# EAGLE board Main BoardV4 (EAGLE 9.1.3)
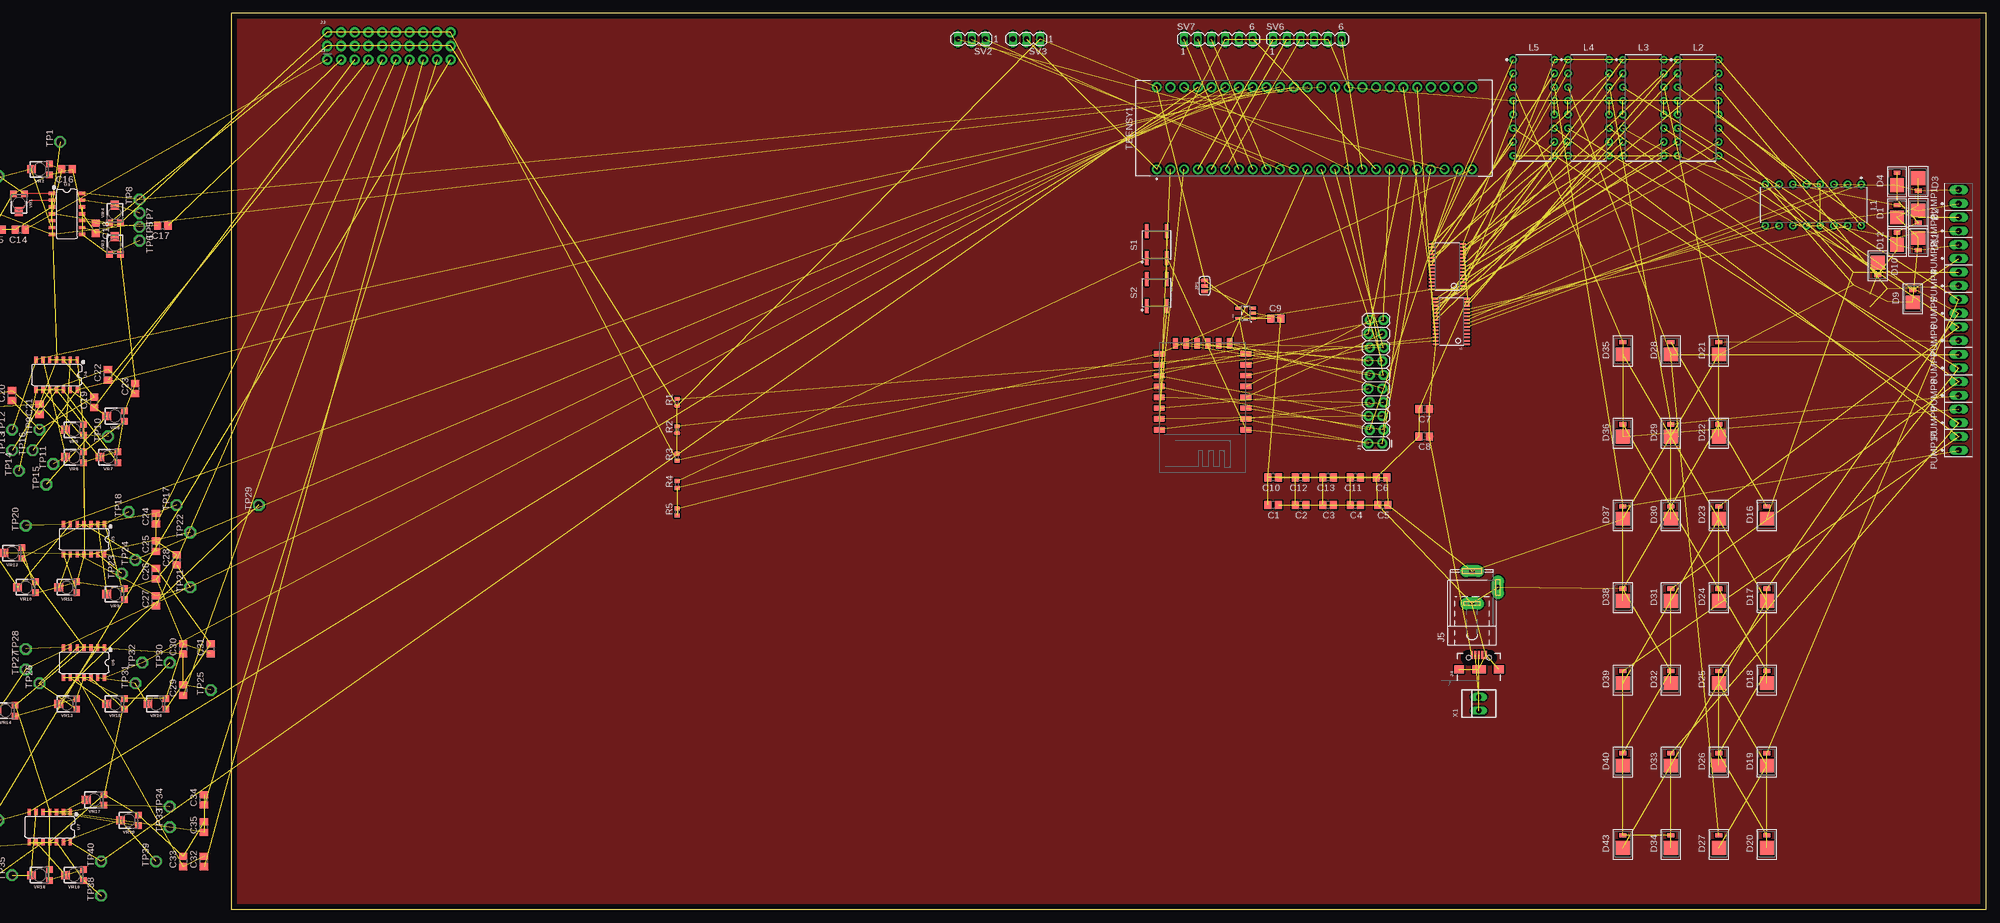
[diagram p0: board, top side]
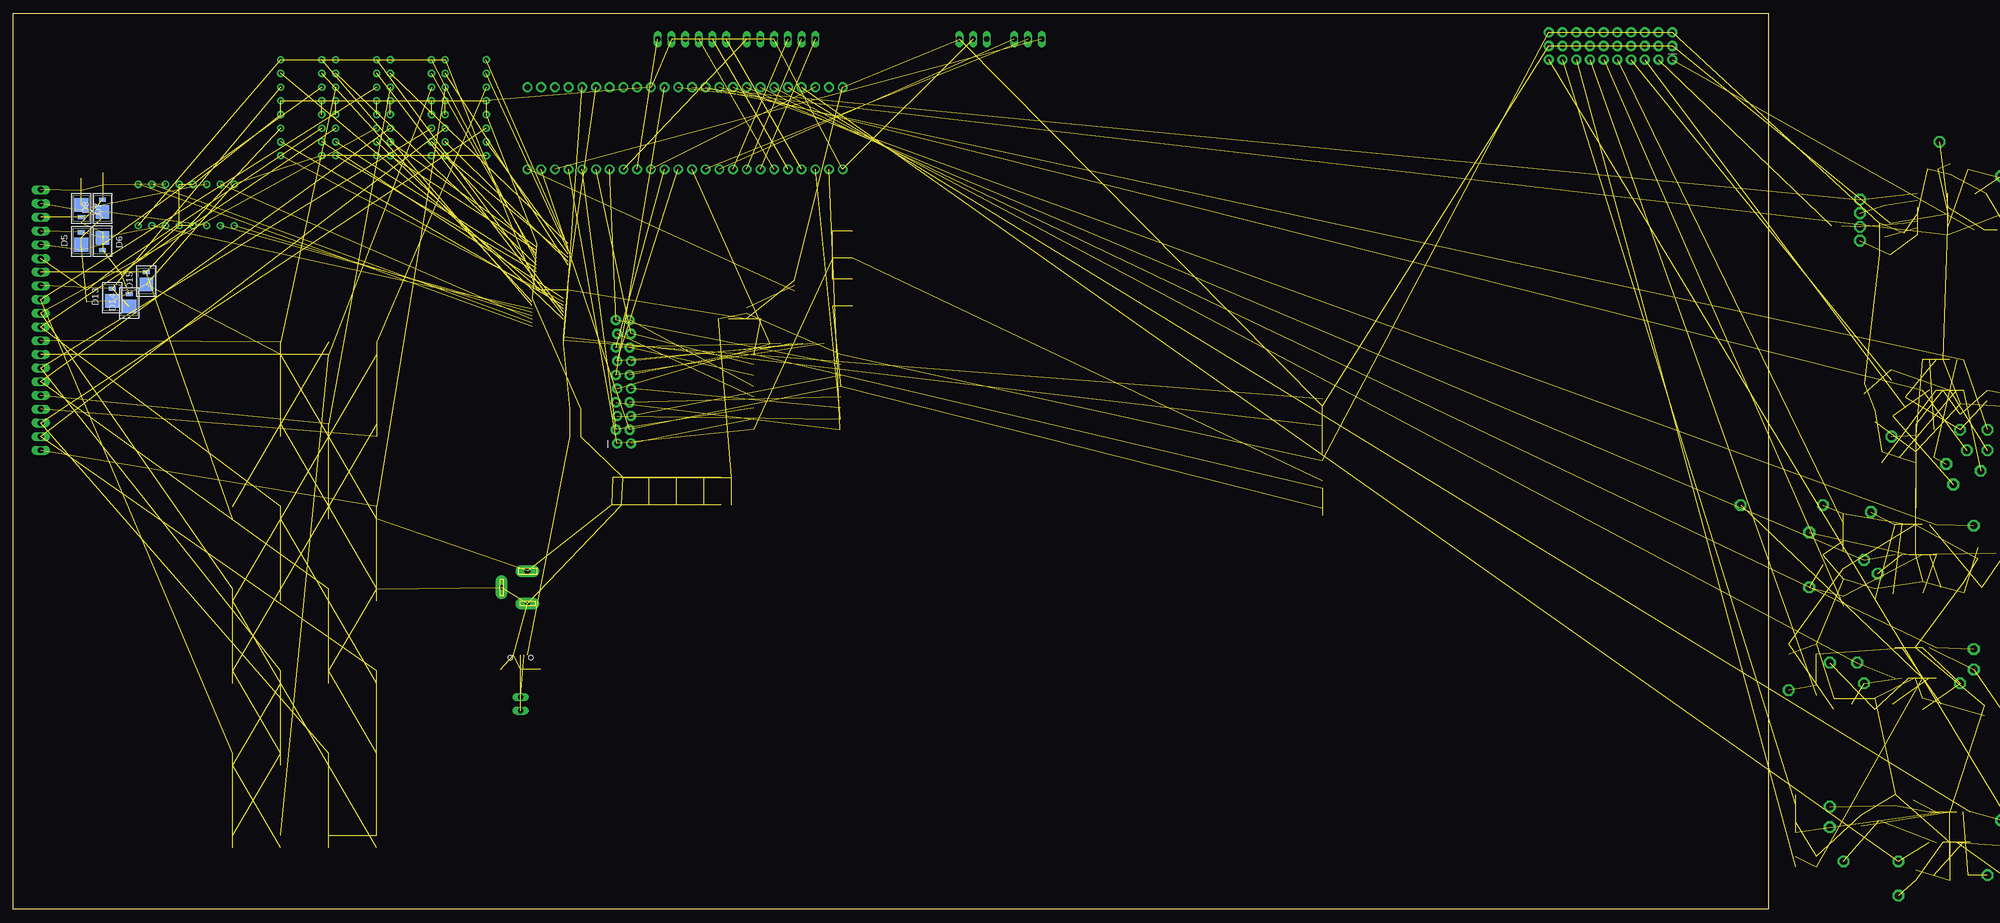
[diagram p1: board, bottom side, seen from below]

Size 325.1 x 166.04 mm. Coordinates in mm from the lower left corner, seen from the top.
Outline: 0,0 325.1,0 325.1,166.04 0,166.04 0,0
Copper layers (1*16): Top 0.035mm / dielectric 1.5mm / Bottom 0.035mm
Design rules "default": minimum track width 6mil, minimum drill 0.35mm, track to track 6mil, track to pad 6mil, pad to pad 6mil, via to via 6mil, smd to smd 6mil, copper to edge 40mil, drill to drill 6mil, minimum pad ring 10mil, minimum via ring 8mil, stop-mask expansion 4mil, vias tented up to drill 0mil, thermal gap 10mil
Net classes: 1 Motor: width 0.782 mm, drill 0.6 mm, clearance 0.152 mm

## Footprints (pad centres in the part's own frame; a part is rotated, then mirrored left to right if it is on the bottom)
C0805 = smd 1.3 x 1.5: 1 -0.95,0; 2 0.95,0
DIOC4519X114 = smd 2.54 x 2.54: 1 -1.27,0 | smd 0.762 x 1.27: 2 1.016,0
ESP8266MOD = smd 2.007 x 0.991: 1 0,0; 2 0,-2.007; 3 0,-4.013; 4 0,-6.02; 5 0,-8.026; 6 0,-10.033; 7 0,-12.04; 8 0,-14.046; 15 16.053,-14.046; 16 16.053,-12.04; 17 16.053,-10.033; 18 16.053,-8.026; 19 16.053,-6.02; 20 16.053,-4.013; 21 16.053,-2.007; 22 16.002,0 | smd 0.991 x 2.007: 9 2.997,-16.002; 10 5.004,-16.002; 11 7.01,-16.002; 12 9.017,-16.002; 13 11.024,-16.002; 14 13.03,-16.002
1X10_NO_SILK = drill 1.016 pad 1.88: 1 0,0; 2 2.54,0; 3 5.08,0; 4 7.62,0; 5 10.16,0; 6 12.7,0; 7 15.24,0; 8 17.78,0; 9 20.32,0; 10 22.86,0
2X10_NOSILK = drill 1.016 pad 1.88: 1 0,0; 2 0,2.54; 3 2.54,0; 4 2.54,2.54; 5 5.08,0; 6 5.08,2.54; 7 7.62,0; 8 7.62,2.54; 9 10.16,0; 10 10.16,2.54; 11 12.7,0; 12 12.7,2.54; 13 15.24,0; 14 15.24,2.54; 15 17.78,0; 16 17.78,2.54; 17 20.32,0; 18 20.32,2.54; 19 22.86,0; 20 22.86,2.54
2X10_LOCK = drill 1.016 pad 1.88: 1 0,0.127; 2 0,2.667; 3 2.54,-0.127; 4 2.54,2.413; 5 5.08,0.127; 6 5.08,2.667; 7 7.62,-0.127; 8 7.62,2.413; 9 10.16,0.127; 10 10.16,2.667; 11 12.7,-0.127; 12 12.7,2.413; 13 15.24,0.127; 14 15.24,2.667; 15 17.78,-0.127; 16 17.78,2.413; 17 20.32,0.127; 18 20.32,2.667; 19 22.86,-0.127; 20 22.86,2.413
USB-B-MICRO-SMD = smd 1.45 x 0.4: D+ 2.725,0; D- 2.725,0.65; GND 2.725,-1.3; ID 2.725,-0.65; VBUS 2.725,1.3 | smd 1.5 x 1.8: SHIELD1 0,3.685; SHIELD2 0,-3.685 | smd 1.5 x 2.5: SHIELD3 0,0 | hole 0.85: 2.2,1.9; 2.2,-1.9
SPC4077 = drill 0.8 pad 2.184 long: 1 -3,0; 2 0,-4.8 | drill 1 pad 2.184 long: 3 3,0
SMT-JUMPER_3_1-NC_TRACE_SILK = smd 0.635 x 1.27: 1 -1.016,0; 2 0,0; 3 1.016,0
DIP762W53P254L1969H508Q16B = drill 0.743 pad 1.343: 1 -3.81,8.89; 2 -3.81,6.35; 3 -3.81,3.81; 4 -3.81,1.27; 5 -3.81,-1.27; 6 -3.81,-3.81; 7 -3.81,-6.35; 8 -3.81,-8.89; 9 3.81,-8.89; 10 3.81,-6.35; 11 3.81,-3.81; 12 3.81,-1.27; 13 3.81,1.27; 14 3.81,3.81; 15 3.81,6.35; 16 3.81,8.89
1X2_HEADER = drill 1.105 pad 1.705 long: 1 0,0; 2 2.54,0
R0402 = smd 0.7 x 0.9: 1 -0.65,0; 2 0.65,0
SOT370P645X154-4 = smd 2.605 x 0.712: 1 -2.522,1.85; 2 -2.522,-1.85; 3 2.522,-1.85; 4 2.522,1.85
MA03-1 = drill 1.016 long: 1 -2.54,0; 2 0,0; 3 2.54,0
MA06-1 = drill 1.016 long: 1 -6.35,0; 2 -3.81,0; 3 -1.27,0; 4 1.27,0; 5 3.81,0; 6 6.35,0
DIP1524W60P254L6350H635Q48A = drill 1.112 pad 1.812: 1 -7.62,29.21; 2 -7.62,26.67; 3 -7.62,24.13; 4 -7.62,21.59; 5 -7.62,19.05; 6 -7.62,16.51; 7 -7.62,13.97; 8 -7.62,11.43; 9 -7.62,8.89; 10 -7.62,6.35; 11 -7.62,3.81; 12 -7.62,1.27; 13 -7.62,-1.27; 14 -7.62,-3.81; 15 -7.62,-6.35; 16 -7.62,-8.89; 17 -7.62,-11.43; 18 -7.62,-13.97; 19 -7.62,-16.51; 20 -7.62,-19.05; 21 -7.62,-21.59; 22 -7.62,-24.13; 23 -7.62,-26.67; 24 -7.62,-29.21; 25 7.62,-29.21; 26 7.62,-26.67; 27 7.62,-24.13; 28 7.62,-21.59; 29 7.62,-19.05; 30 7.62,-16.51; 31 7.62,-13.97; 32 7.62,-11.43; 33 7.62,-8.89; 34 7.62,-6.35; 35 7.62,-3.81; 36 7.62,-1.27; 37 7.62,1.27; 38 7.62,3.81; 39 7.62,6.35; 40 7.62,8.89; 41 7.62,11.43; 42 7.62,13.97; 43 7.62,16.51; 44 7.62,19.05; 45 7.62,21.59; 46 7.62,24.13; 47 7.62,26.67; 48 7.62,29.21
P1-13 = drill 1.321 pad 2.159 octagon: TP 0,0
TSSOP28 = smd 0.305 x 0.991: 1 -4.225,-2.918; 2 -3.575,-2.918; 3 -2.925,-2.918; 4 -2.275,-2.918; 5 -1.625,-2.918; 6 -0.975,-2.918; 7 -0.325,-2.918; 8 0.325,-2.918; 9 0.975,-2.918; 10 1.625,-2.918; 11 2.275,-2.918; 12 2.925,-2.918; 13 3.575,-2.918; 14 4.225,-2.918; 15 4.225,2.918; 16 3.575,2.918; 17 2.925,2.918; 18 2.275,2.918; 19 1.625,2.918; 20 0.975,2.918; 21 0.325,2.918; 22 -0.325,2.918; 23 -0.975,2.918; 24 -1.625,2.918; 25 -2.275,2.918; 26 -2.925,2.918; 27 -3.575,2.918; 28 -4.225,2.918
SO14 = smd 0.6 x 1.2: 1 -3.175,-2.8; 2 -1.905,-2.8; 3 -0.635,-2.8; 4 0.635,-2.8; 5 1.905,-2.8; 6 3.175,-2.8; 7 4.445,-2.8; 8 4.445,2.8; 9 3.175,2.8; 10 1.905,2.8; 11 0.635,2.8; 12 -0.635,2.8; 13 -1.905,2.8; 14 -3.175,2.8
SOT23-5 = smd 0.55 x 1.2: 1 -0.95,-1.3; 2 0,-1.3; 3 0.95,-1.3; 4 0.95,1.3; 5 -0.95,1.3
TRIMPOT-SMD-TC33X = smd 1.2 x 1.2: 1 -1,-1.825; 3 1,-1.825 | smd 1.5 x 1.6: 2 0,1.5
22-23-2021 = drill 1 long: 1 -1.27,0; 2 1.27,0

## Placement (x,y rotation side)
C1  [C0805]  193.04,74.93 180 top
C2  [C0805]  198.12,74.93 180 top
C3  [C0805]  203.2,74.93 180 top
C4  [C0805]  208.28,74.93 180 top
C5  [C0805]  213.36,74.93 180 top
C6  [C0805]  213.11,80.01 180 top
C7  [C0805]  220.98,92.71 180 top
C8  [C0805]  220.98,87.63 180 top
C9  [C0805]  193.55,109.47 0 top
C10  [C0805]  193.04,80.01 180 top
C11  [C0805]  208.28,80.01 180 top
C12  [C0805]  198.12,80.01 180 top
C13  [C0805]  203.2,80.01 180 top
C14  [C0805]  -39.12,125.98 180 top  (outside the outline)
C15  [C0805]  -43.43,125.98 180 top  (outside the outline)
C16  [C0805]  -30.48,137.16 180 top  (outside the outline)
C17  [C0805]  -12.7,126.75 180 top  (outside the outline)
C18  [C0805]  -25.15,126.24 270 top  (outside the outline)
C19  [C0805]  -25.4,93.98 90 top  (outside the outline)
C20  [C0805]  -40.64,95.25 90 top  (outside the outline)
C21  [C0805]  -35.56,92.71 90 top  (outside the outline)
C22  [C0805]  -22.86,99.06 90 top  (outside the outline)
C23  [C0805]  -17.78,96.52 90 top  (outside the outline)
C24  [C0805]  -13.97,72.39 90 top  (outside the outline)
C25  [C0805]  -13.97,67.31 90 top  (outside the outline)
C26  [C0805]  -13.97,62.23 90 top  (outside the outline)
C27  [C0805]  -13.97,57.15 90 top  (outside the outline)
C28  [C0805]  -10.16,64.77 90 top  (outside the outline)
C29  [C0805]  -8.89,40.64 90 top  (outside the outline)
C30  [C0805]  -8.89,48.26 90 top  (outside the outline)
C31  [C0805]  -3.81,48.26 90 top  (outside the outline)
C32  [C0805]  -5.08,8.89 90 top  (outside the outline)
C33  [C0805]  -8.89,8.89 90 top  (outside the outline)
C34  [C0805]  -5.08,20.32 90 top  (outside the outline)
C35  [C0805]  -5.08,15.24 90 top  (outside the outline)
C36  [C0805]  -46.99,93.98 270 top  (outside the outline)
C37  [C0805]  -52.07,5.08 90 top  (outside the outline)
C38  [C0805]  -52.07,10.16 90 top  (outside the outline)
D1  UPR5E3-DIODE  [DIOC4519X114]  308.61,129.54 90 top
D2  UPR5E3-DIODE  [DIOC4519X114]  312.55,128.27 270 top
D3  UPR5E3-DIODE  [DIOC4519X114]  312.55,134.24 270 top
D4  UPR5E3-DIODE  [DIOC4519X114]  308.61,135.51 90 top
D5  UPR5E3-DIODE  [DIOC4519X114]  312.55,124.46 90 bottom
D6  UPR5E3-DIODE  [DIOC4519X114]  308.61,123.19 270 bottom
D7  UPR5E3-DIODE  [DIOC4519X114]  312.55,129.29 270 bottom
D8  UPR5E3-DIODE  [DIOC4519X114]  308.61,130.56 90 bottom
D9  UPR5E3-DIODE  [DIOC4519X114]  311.53,113.79 90 top
D10  UPR5E3-DIODE  [DIOC4519X114]  305.05,118.62 270 top
D11  UPR5E3-DIODE  [DIOC4519X114]  312.55,123.19 270 top
D12  UPR5E3-DIODE  [DIOC4519X114]  308.61,124.46 90 top
D13  UPR5E3-DIODE  [DIOC4519X114]  306.83,114.05 90 bottom
D14  UPR5E3-DIODE  [DIOC4519X114]  303.66,113.03 90 bottom
D15  UPR5E3-DIODE  [DIOC4519X114]  300.48,117.09 90 bottom
D16  UPR5E3-DIODE  [DIOC4519X114]  284.48,73.66 90 top
D17  UPR5E3-DIODE  [DIOC4519X114]  284.48,58.42 90 top
D18  UPR5E3-DIODE  [DIOC4519X114]  284.48,43.18 90 top
D19  UPR5E3-DIODE  [DIOC4519X114]  284.48,27.94 90 top
D20  UPR5E3-DIODE  [DIOC4519X114]  284.48,12.7 90 top
D21  UPR5E3-DIODE  [DIOC4519X114]  275.59,104.14 90 top
D22  UPR5E3-DIODE  [DIOC4519X114]  275.59,88.9 90 top
D23  UPR5E3-DIODE  [DIOC4519X114]  275.59,73.66 90 top
D24  UPR5E3-DIODE  [DIOC4519X114]  275.59,58.42 90 top
D25  UPR5E3-DIODE  [DIOC4519X114]  275.59,43.18 90 top
D26  UPR5E3-DIODE  [DIOC4519X114]  275.59,27.94 90 top
D27  UPR5E3-DIODE  [DIOC4519X114]  275.59,12.7 90 top
D28  UPR5E3-DIODE  [DIOC4519X114]  266.7,104.14 90 top
D29  UPR5E3-DIODE  [DIOC4519X114]  266.7,88.9 90 top
D30  UPR5E3-DIODE  [DIOC4519X114]  266.7,73.66 90 top
D31  UPR5E3-DIODE  [DIOC4519X114]  266.7,58.42 90 top
D32  UPR5E3-DIODE  [DIOC4519X114]  266.7,43.18 90 top
D33  UPR5E3-DIODE  [DIOC4519X114]  266.7,27.94 90 top
D34  UPR5E3-DIODE  [DIOC4519X114]  266.7,12.7 90 top
D35  UPR5E3-DIODE  [DIOC4519X114]  257.81,104.14 90 top
D36  UPR5E3-DIODE  [DIOC4519X114]  257.81,88.9 90 top
D37  UPR5E3-DIODE  [DIOC4519X114]  257.81,73.66 90 top
D38  UPR5E3-DIODE  [DIOC4519X114]  257.81,58.42 90 top
D39  UPR5E3-DIODE  [DIOC4519X114]  257.81,43.18 90 top
D40  UPR5E3-DIODE  [DIOC4519X114]  257.81,27.94 90 top
D43  UPR5E3-DIODE  [DIOC4519X114]  257.81,12.7 90 top
ESP1  ESP8266  [ESP8266MOD]  187.96,88.9 180 top
J1  [1X10_NO_SILK]  17.78,157.48 0 top
J2  [2X10_NOSILK]  17.78,160.02 0 top
J3  [2X10_LOCK]  213.36,86.36 90 top
J4  [USB-B-MICRO-SMD]  231.14,44.45 90 top
J5  [SPC4077]  229.87,59.69 90 top
JP1  JUMPER-SMT_3_1-NC_TRACE_SILK  [SMT-JUMPER_3_1-NC_TRACE_SILK]  180.34,115.57 90 top
L1  L293  [DIP762W53P254L1969H508Q16B]  293.12,130.56 270 top
L2  L293  [DIP762W53P254L1969H508Q16B]  271.78,148.59 0 top
L3  L293  [DIP762W53P254L1969H508Q16B]  261.62,148.59 0 top
L4  L293  [DIP762W53P254L1969H508Q16B]  251.46,148.59 0 top
L5  L293  [DIP762W53P254L1969H508Q16B]  241.3,148.59 0 top
PUMP1  PUMPS  [1X2_HEADER]  320.04,130.81 90 top
PUMP2  PUMPS  [1X2_HEADER]  320.04,125.73 90 top
PUMP3  PUMPS  [1X2_HEADER]  320.04,120.65 90 top
PUMP4  PUMPS  [1X2_HEADER]  320.04,115.57 90 top
PUMP5  PUMPS  [1X2_HEADER]  320.04,110.49 90 top
PUMP6  PUMPS  [1X2_HEADER]  320.04,105.41 90 top
PUMP7  PUMPS  [1X2_HEADER]  320.04,100.33 90 top
PUMP8  PUMPS  [1X2_HEADER]  320.04,95.25 90 top
PUMP9  PUMPS  [1X2_HEADER]  320.04,90.17 90 top
PUMP10  PUMPS  [1X2_HEADER]  320.04,85.09 90 top
R1  10k  [R0402]  82.55,93.98 90 top
R2  10k  [R0402]  82.55,88.9 90 top
R3  10k  [R0402]  82.55,83.82 90 top
R4  10k  [R0402]  82.55,78.74 90 top
R5  10k  [R0402]  82.55,73.66 90 top
S1  BUTTON  [SOT370P645X154-4]  171.45,123.19 90 top
S2  BUTTON  [SOT370P645X154-4]  171.45,114.3 90 top
SV2  [MA03-1]  137.16,161.29 180 top
SV3  [MA03-1]  147.32,161.29 180 top
SV6  [MA06-1]  199.39,161.29 0 top
SV7  [MA06-1]  182.88,161.29 0 top
TEENSY1  TEENSY_3.5  [DIP1524W60P254L6350H635Q48A]  200.66,144.78 90 top
TP1  TPPAD1-13  [P1-13]  -31.75,142.24 90 top  (outside the outline)
TP2  TPPAD1-13  [P1-13]  -43.18,135.89 90 top  (outside the outline)
TP3  TPPAD1-13  [P1-13]  -46.99,134.62 90 top  (outside the outline)
TP4  TPPAD1-13  [P1-13]  -48.26,130.81 90 top  (outside the outline)
TP5  TPPAD1-13  [P1-13]  -17.02,126.49 270 top  (outside the outline)
TP6  TPPAD1-13  [P1-13]  -17.02,123.95 270 top  (outside the outline)
TP7  TPPAD1-13  [P1-13]  -17.02,129.03 270 top  (outside the outline)
TP8  TPPAD1-13  [P1-13]  -17.02,131.57 90 top  (outside the outline)
TP9  TPPAD1-13  [P1-13]  -35.56,88.9 90 top  (outside the outline)
TP10  TPPAD1-13  [P1-13]  -22.86,87.63 90 top  (outside the outline)
TP11  TPPAD1-13  [P1-13]  -33.02,82.55 90 top  (outside the outline)
TP12  TPPAD1-13  [P1-13]  -40.64,88.9 90 top  (outside the outline)
TP13  TPPAD1-13  [P1-13]  -40.64,85.09 90 top  (outside the outline)
TP14  TPPAD1-13  [P1-13]  -39.37,81.28 90 top  (outside the outline)
TP15  TPPAD1-13  [P1-13]  -34.29,78.74 90 top  (outside the outline)
TP16  TPPAD1-13  [P1-13]  -36.83,85.09 90 top  (outside the outline)
TP17  TPPAD1-13  [P1-13]  -10.16,74.93 90 top  (outside the outline)
TP18  TPPAD1-13  [P1-13]  -19.05,73.66 90 top  (outside the outline)
TP19  TPPAD1-13  [P1-13]  -45.72,68.58 90 top  (outside the outline)
TP20  TPPAD1-13  [P1-13]  -38.1,71.12 90 top  (outside the outline)
TP21  TPPAD1-13  [P1-13]  -7.62,59.69 90 top  (outside the outline)
TP22  TPPAD1-13  [P1-13]  -7.62,69.85 90 top  (outside the outline)
TP23  TPPAD1-13  [P1-13]  -20.32,62.23 90 top  (outside the outline)
TP24  TPPAD1-13  [P1-13]  -17.78,64.77 90 top  (outside the outline)
TP25  TPPAD1-13  [P1-13]  -3.81,40.64 90 top  (outside the outline)
TP26  TPPAD1-13  [P1-13]  -35.56,41.91 90 top  (outside the outline)
TP27  TPPAD1-13  [P1-13]  -38.1,44.45 90 top  (outside the outline)
TP28  TPPAD1-13  [P1-13]  -38.1,48.26 90 top  (outside the outline)
TP29  TPPAD1-13  [P1-13]  5.08,74.93 90 top
TP30  TPPAD1-13  [P1-13]  -11.43,45.72 90 top  (outside the outline)
TP31  TPPAD1-13  [P1-13]  -17.78,41.91 90 top  (outside the outline)
TP32  TPPAD1-13  [P1-13]  -16.51,45.72 90 top  (outside the outline)
TP33  TPPAD1-13  [P1-13]  -11.43,15.24 90 top  (outside the outline)
TP34  TPPAD1-13  [P1-13]  -11.43,19.05 90 top  (outside the outline)
TP35  TPPAD1-13  [P1-13]  -40.64,6.35 90 top  (outside the outline)
TP36  TPPAD1-13  [P1-13]  -43.18,16.51 90 top  (outside the outline)
TP37  TPPAD1-13  [P1-13]  -46.99,3.81 90 top  (outside the outline)
TP38  TPPAD1-13  [P1-13]  -24.13,2.54 90 top  (outside the outline)
TP39  TPPAD1-13  [P1-13]  -13.97,8.89 90 top  (outside the outline)
TP40  TPPAD1-13  [P1-13]  -24.13,8.89 90 top  (outside the outline)
U1  [TSSOP28]  226.06,108.97 90 top
U2  [TSSOP28]  225.3,119.13 90 top
U3  LMV324  [SO14]  -30.48,129.54 270 top  (outside the outline)
U4  LMV324  [SO14]  -31.75,99.06 180 top  (outside the outline)
U5  LMV324  [SO14]  -26.67,68.58 180 top  (outside the outline)
U6  LMV324  [SO14]  -26.67,45.72 180 top  (outside the outline)
U7  LMV324  [SO14]  -33.02,15.24 180 top  (outside the outline)
U8  3.3V  [SOT23-5]  187.96,110.49 90 top
VR1  10k  [TRIMPOT-SMD-TC33X]  -39.37,130.81 180 top  (outside the outline)
VR2  10k  [TRIMPOT-SMD-TC33X]  -35.56,137.16 90 top  (outside the outline)
VR3  10k  [TRIMPOT-SMD-TC33X]  -21.59,123.19 0 top  (outside the outline)
VR4  10k  [TRIMPOT-SMD-TC33X]  -21.59,129.03 0 top  (outside the outline)
VR5  10k  [TRIMPOT-SMD-TC33X]  -29.21,88.9 90 top  (outside the outline)
VR6  10k  [TRIMPOT-SMD-TC33X]  -29.21,83.82 90 top  (outside the outline)
VR7  10k  [TRIMPOT-SMD-TC33X]  -22.86,83.82 90 top  (outside the outline)
VR8  10k  [TRIMPOT-SMD-TC33X]  -21.59,91.44 90 top  (outside the outline)
VR9  10k  [TRIMPOT-SMD-TC33X]  -21.59,58.42 90 top  (outside the outline)
VR10  10k  [TRIMPOT-SMD-TC33X]  -38.1,59.69 90 top  (outside the outline)
VR11  10k  [TRIMPOT-SMD-TC33X]  -30.48,59.69 90 top  (outside the outline)
VR12  10k  [TRIMPOT-SMD-TC33X]  -40.64,66.04 90 top  (outside the outline)
VR13  10k  [TRIMPOT-SMD-TC33X]  -30.48,38.1 90 top  (outside the outline)
VR14  10k  [TRIMPOT-SMD-TC33X]  -41.91,36.83 90 top  (outside the outline)
VR15  10k  [TRIMPOT-SMD-TC33X]  -21.59,38.1 90 top  (outside the outline)
VR16  10k  [TRIMPOT-SMD-TC33X]  -13.97,38.1 90 top  (outside the outline)
VR17  10k  [TRIMPOT-SMD-TC33X]  -25.4,20.32 90 top  (outside the outline)
VR18  10k  [TRIMPOT-SMD-TC33X]  -35.56,6.35 90 top  (outside the outline)
VR19  10k  [TRIMPOT-SMD-TC33X]  -29.21,6.35 90 top  (outside the outline)
VR20  10k  [TRIMPOT-SMD-TC33X]  -19.05,16.51 90 top  (outside the outline)
X1  22-23-2021  [22-23-2021]  231.14,38.1 90 top

## Library data of the parts
C1-C38 = sym
D1-D40 D43 = EPR5E3-Diode
ESP1 = ESP8266
J1 = SparkFun-Connectors; PROD_ID: CONN-11563
J2 J3 = SparkFun-Connectors
J4 = SparkFun-Connectors; PROD_ID: CONN-11752
J5 = con-jack; OC_FARNELL: unknown; OC_NEWARK: unknown
JP1 = SparkFun-Jumpers
L1-L5 = L293
PUMP1-PUMP10 = Peristaltic pump
R1-R5 U1 U2 = adafruit
S1 S2 = TactileSMDbutton
SV2 SV3 SV6 SV7 = con-lstb; OC_FARNELL: unknown; OC_NEWARK: unknown
TEENSY1 = Teensy_3.5
TP1-TP40 = testpad
U3-U7 = SparkFun-IC-Amplifiers; PROD_ID: IC-08227
U8 = SparkFun-IC-Power; PROD_ID: VREG-12457
VR1-VR20 = SparkFun-Resistors; PROD_ID: RES-12428
X1 = con-molex; MF: MOLEX; MPN: 22-23-2021; OC_FARNELL: 1462926; OC_NEWARK: 25C3832

## Nets
3.3V: TEENSY1.15 TEENSY1.46
3V-WIFI: C9.1 ESP1.8 R4.1 R5.1 U8.5
5V: C7.1 C8.1 C16.2 C21.2 C26.2 C31.2 C36.2 J2.1 J2.3 J2.5 J2.7 J2.9 J2.11 J2.13 J2.15 J2.17 J2.19 J4.VBUS JP1.3 L1.16 L2.16 L3.16 L4.16 L5.16 R1.1 R2.1 R3.2 SV3.1 TEENSY1.48 U1.28 U2.1 U2.28 U3.4 U4.4 U5.4 U6.4 U7.4 U8.1 VR2.3 VR4.1 VR6.3 VR8.1 VR10.3 VR12.1 VR14.3 VR16.1 VR18.3 VR20.1
12V: C1.1 C2.1 C3.1 C4.1 C5.1 C6.1 C10.1 C11.1 C12.1 C13.1 D1.1 D3.1 D5.1 D7.1 D9.1 D11.1 D13.1 D15.1 D17.1 D19.1 D21.1 D23.1 D25.1 D27.1 D29.1 D31.1 D33.1 D35.1 D37.1 D39.1 D43.1 J5.3 L1.8 L2.8 L3.8 L4.8 L5.8
/RESET: SV2.3 TEENSY1.22
ADC: ESP1.2 J3.2
CSO-ESP: ESP1.9 J3.9 TEENSY1.12
D+: J4.D+ X1.1
D-: J4.D- X1.2
EN1: C14.1 J1.1
EN1MCU: TEENSY1.36 TP4.TP U3.7
EN2: C17.1 J1.2
EN2MCU: TEENSY1.37 TP8.TP U3.14
EN3: C19.1 J1.3
EN3MCU: TEENSY1.38 TP12.TP U4.7
EN4: C22.1 J1.4
EN4MCU: TEENSY1.39 TP16.TP U4.14
EN5: C24.1 J1.5
EN5MCU: TEENSY1.40 TP20.TP U5.7
EN6: C27.1 J1.6
EN6MCU: TEENSY1.41 TP24.TP U5.14
EN7: C29.1 J1.7
EN7MCU: TEENSY1.42 TP28.TP U6.7
EN8: C32.1 J1.8
EN8MCU: TEENSY1.43 TP32.TP U6.14
EN9: C34.1 J1.9
EN9MCU: TEENSY1.44 TP36.TP U7.7
EN10: C37.1 J1.10
EN10MCU: TEENSY1.45 TP40.TP U7.14
EN-WIFI: JP1.1 TEENSY1.24
ENABLE: ESP1.3 J3.3 TEENSY1.20
GND: C1.2 C2.2 C3.2 C4.2 C5.2 C6.2 C7.2 C8.2 C9.2 C10.2 C11.2 C12.2 C13.2 C15.2 C16.1 C18.2 C20.2 C21.1 C23.2 C25.2 C26.1 C28.2 C30.2 C31.1 C33.2 C35.2 C36.1 C38.2 D2.2 D4.2 D6.2 D8.2 D10.2 D12.2 D14.2 D16.2 D18.2 D20.2 D22.2 D24.2 D26.2 D28.2 D30.2 D32.2 D34.2 D36.2 D38.2 D40.2 D43.2 ESP1.15 J2.2 J2.4 J2.6 J2.8 J2.10 J2.12 J2.14 J2.16 J2.18 J2.20 J4.GND J4.SHIELD1 J4.SHIELD2 J4.SHIELD3 J5.1 J5.2 L1.4 L1.5 L1.12 L1.13 L2.4 L2.5 L2.12 L2.13 L3.4 L3.5 L3.12 L3.13 L4.4 L4.5 L4.12 L4.13 L5.4 L5.5 L5.12 L5.13 R3.1 SV3.2 SV6.4 SV6.5 SV7.4 SV7.5 TEENSY1.1 TEENSY1.34 U1.14 U2.14 U3.11 U4.11 U5.11 U6.11 U7.11 U8.2 VR1.3 VR2.1 VR3.3 VR4.3 VR5.3 VR6.1 VR7.3 VR8.3 VR9.3 VR10.1 VR11.3 VR12.3 VR13.3 VR14.1 VR15.3 VR16.3 VR17.3 VR18.1 VR19.3 VR20.3
GPIO0: ESP1.18 J3.4 R5.2 S2.1 S2.2 TEENSY1.23
GPIO2: ESP1.17 J3.6
GPIO4: ESP1.19 J3.8
GPIO5: ESP1.20 J3.10
GPIO9: ESP1.11 J3.12
GPIO10: ESP1.12 J3.14
GPIO12: ESP1.6 J3.16
GPIO13: ESP1.7 J3.18 TEENSY1.19
GPIO14: ESP1.5 J3.20
GPIO15: ESP1.16 J3.19 TEENSY1.18
GPIO16: ESP1.4 J3.17
M1+: D1.2 D2.1 L1.6 PUMP1.1
M1-: D3.2 D4.1 L1.3 PUMP1.2
M2+: D5.2 D6.1 L1.14 PUMP2.1
M2-: D7.2 D8.1 L1.11 PUMP2.2
M3+: D9.2 D10.1 L2.6 PUMP3.1
M3-: D11.2 D12.1 L2.3 PUMP3.2
M4+: D13.2 D14.1 L2.14 PUMP4.1
M4-: D15.2 D16.1 L2.11 PUMP4.2
M5+: D17.2 D18.1 L3.6 PUMP5.1
M5-: D19.2 D20.1 L3.3 PUMP5.2
M6+: D21.2 D22.1 L3.14 PUMP6.1
M6-: D23.2 D24.1 L3.11 PUMP6.2
M7+: D25.2 D26.1 L4.6 PUMP7.1
M7-: D27.2 D28.1 L4.3 PUMP7.2
M8+: D29.2 D30.1 L4.14 PUMP8.1
M8-: D31.2 D32.1 L4.11 PUMP8.2
M9+: D33.2 D34.1 L5.6 PUMP9.1
M9-: D35.2 D36.1 L5.3 PUMP9.2
M10+: D37.2 D38.1 L5.14 PUMP10.1
M10-: D39.2 D40.1 L5.11 PUMP10.2
MISO-ESP: ESP1.10 J3.15 TEENSY1.14
MOSI-ESP: ESP1.13 J3.13 TEENSY1.13
N$1: U4.2 VR5.2
N$2: U3.2 VR1.2
N$3: TP11.TP U4.6 VR6.2
N$4: U4.9 VR7.2
N$5: TP15.TP U4.13 VR8.2
N$6: U5.2 VR9.2
N$7: TP3.TP U3.6 VR2.2
N$8: TP19.TP U5.6 VR10.2
N$9: U5.9 VR11.2
N$10: TP23.TP U5.13 VR12.2
N$12: U3.9 VR3.2
N$13: TP7.TP U3.13 VR4.2
N$18: U6.2 VR13.2
N$19: TP27.TP U6.6 VR14.2
N$20: U6.9 VR15.2
N$25: TP31.TP U6.13 VR16.2
N$26: U7.2 VR17.2
N$27: TP35.TP U7.6 VR18.2
N$28: U7.9 VR19.2
N$29: TP39.TP U7.13 VR20.2
N$30: JP1.2 U8.3
N$31: S1.3 S1.4 S2.3 S2.4
PU1EN: L1.1 U1.6
PU1L: L1.2 U1.7
PU1R: L1.7 U1.8
PU2EN: L1.9 U1.9
PU2L: L1.10 U1.10
PU2R: L1.15 U1.11
PU3EN: L2.1 U1.12
PU3L: L2.2 U1.13
PU3R: L2.7 U1.15
PU4EN: L2.9 U1.16
PU4L: L2.10 U1.17
PU4R: L2.15 U1.18
PU5EN: L3.1 U1.19
PU5L: L3.2 U1.20
PU5R: L3.7 U1.21
PU6EN: L3.9 U2.6
PU6L: L3.10 U2.7
PU6R: L3.15 U2.8
PU7EN: L4.1 U2.9
PU7L: L4.2 U2.10
PU7R: L4.7 U2.11
PU8EN: L4.9 U2.12
PU8L: L4.10 U2.13
PU8R: L4.15 U2.15
PU9EN: L5.1 U2.16
PU9L: L5.2 U2.17
PU9R: L5.7 U2.18
PU10EN: L5.9 U2.19
PU10L: L5.10 U2.20
PU10R: L5.15 U2.21
RST: ESP1.1 J3.1 R4.2 S1.1 S1.2 TEENSY1.21
RXD-ESP: ESP1.21 J3.5 TEENSY1.3
SBUSY: SV2.2 TEENSY1.11
SCL: R2.2 TEENSY1.30 U1.26 U2.26
SCLK-ESP: ESP1.14 J3.11 TEENSY1.35
SDA: R1.2 TEENSY1.29 U1.27 U2.27
SIG1: C14.2 C15.1 TP1.TP U3.3
SIG2: TP2.TP U3.1 U3.5 VR1.1
SIG3: C17.2 C18.1 TP5.TP U3.10
SIG4: TP6.TP U3.8 U3.12 VR3.1
SIG5: C19.2 C20.1 TP9.TP U4.3
SIG6: TP10.TP U4.1 U4.5 VR5.1
SIG7: C22.2 C23.1 TP13.TP U4.10
SIG8: TP14.TP U4.8 U4.12 VR7.1
SIG9: C24.2 C25.1 TP17.TP U5.3
SIG10: TP18.TP U5.1 U5.5 VR9.1
SIG11: C27.2 C28.1 TP21.TP U5.10
SIG12: TP22.TP U5.8 U5.12 VR11.1
SIG13: C29.2 C30.1 TP25.TP U6.3
SIG14: TP26.TP U6.1 U6.5 VR13.1
SIG15: C32.2 C33.1 TP29.TP U6.10
SIG16: TP30.TP U6.8 U6.12 VR15.1
SIG17: C34.2 C35.1 TP33.TP U7.3
SIG18: TP34.TP U7.1 U7.5 VR17.1
SIG19: C37.2 C38.1 TP37.TP U7.10
SIG20: TP38.TP U7.8 U7.12 VR19.1
SIN: SV2.1 TEENSY1.10
SW1B: SV6.3 TEENSY1.6
SW1G: SV6.2 TEENSY1.5
SW1NO+: SV6.6 TEENSY1.16
SW1R: SV6.1 TEENSY1.4
SW2B: SV7.3 TEENSY1.9
SW2G: SV7.2 TEENSY1.8
SW2NO+: SV7.6 TEENSY1.17
SW2R: SV7.1 TEENSY1.7
TXD-ESP: ESP1.22 J3.7 TEENSY1.2

## Tracks (layer width: path | path; a pad name or v marks a point on that pad's centre or on a via)
3.3V  (1 unrouted)
3V-WIFI  (4 unrouted)
5V  (47 unrouted)
  pour Top (isolate 0.305): -1.27,168.91 327.66,168.91 327.66,-2.54 -1.27,-2.54
12V  (36 unrouted)
/RESET  (1 unrouted)
ADC  (1 unrouted)
CSO-ESP  (2 unrouted)
D+  (1 unrouted)
D-  (1 unrouted)
EN1  (1 unrouted)
EN1MCU  (2 unrouted)
EN2  (1 unrouted)
EN2MCU  (2 unrouted)
EN3  (1 unrouted)
EN3MCU  (2 unrouted)
EN4  (1 unrouted)
EN4MCU  (2 unrouted)
EN5  (1 unrouted)
EN5MCU  (2 unrouted)
EN6  (1 unrouted)
EN6MCU  (2 unrouted)
EN7  (1 unrouted)
EN7MCU  (2 unrouted)
EN8  (1 unrouted)
EN8MCU  (2 unrouted)
EN9  (1 unrouted)
EN9MCU  (2 unrouted)
EN10  (1 unrouted)
EN10MCU  (2 unrouted)
EN-WIFI  (1 unrouted)
ENABLE  (2 unrouted)
GND  (121 unrouted)
GPIO0  (5 unrouted)
GPIO2  (1 unrouted)
GPIO4  (1 unrouted)
GPIO5  (1 unrouted)
GPIO9  (1 unrouted)
GPIO10  (1 unrouted)
GPIO12  (1 unrouted)
GPIO13  (2 unrouted)
GPIO14  (1 unrouted)
GPIO15  (2 unrouted)
GPIO16  (1 unrouted)
M1+  (3 unrouted)
M1-  (3 unrouted)
M2+  (3 unrouted)
M2-  (3 unrouted)
M3+  (3 unrouted)
M3-  (3 unrouted)
M4+  (3 unrouted)
M4-  (3 unrouted)
M5+  (3 unrouted)
M5-  (3 unrouted)
M6+  (3 unrouted)
M6-  (3 unrouted)
M7+  (3 unrouted)
M7-  (3 unrouted)
M8+  (3 unrouted)
M8-  (3 unrouted)
M9+  (3 unrouted)
M9-  (3 unrouted)
M10+  (3 unrouted)
M10-  (3 unrouted)
MISO-ESP  (2 unrouted)
MOSI-ESP  (2 unrouted)
N$1  (1 unrouted)
N$2
  Top 0.152: VR1.2 -37.24,131.44 U3.2
N$3  (2 unrouted)
N$4  (1 unrouted)
N$5  (2 unrouted)
N$6  (1 unrouted)
N$7  (2 unrouted)
N$8  (2 unrouted)
N$9  (1 unrouted)
N$10  (2 unrouted)
N$12  (1 unrouted)
N$13  (2 unrouted)
N$18  (1 unrouted)
N$19  (2 unrouted)
N$20  (1 unrouted)
N$25  (2 unrouted)
N$26  (1 unrouted)
N$27  (2 unrouted)
N$28  (1 unrouted)
N$29  (2 unrouted)
N$30  (1 unrouted)
N$31  (3 unrouted)
PU1EN  (1 unrouted)
PU1L  (1 unrouted)
PU1R  (1 unrouted)
PU2EN  (1 unrouted)
PU2L  (1 unrouted)
PU2R  (1 unrouted)
PU3EN  (1 unrouted)
PU3L  (1 unrouted)
PU3R  (1 unrouted)
PU4EN  (1 unrouted)
PU4L  (1 unrouted)
PU4R  (1 unrouted)
PU5EN  (1 unrouted)
PU5L  (1 unrouted)
PU5R  (1 unrouted)
PU6EN  (1 unrouted)
PU6L  (1 unrouted)
PU6R  (1 unrouted)
PU7EN  (1 unrouted)
PU7L  (1 unrouted)
PU7R  (1 unrouted)
PU8EN  (1 unrouted)
PU8L  (1 unrouted)
PU8R  (1 unrouted)
PU9EN  (1 unrouted)
PU9L  (1 unrouted)
PU9R  (1 unrouted)
PU10EN  (1 unrouted)
PU10L  (1 unrouted)
PU10R  (1 unrouted)
RST  (5 unrouted)
RXD-ESP  (2 unrouted)
SBUSY  (1 unrouted)
SCL  (3 unrouted)
SCLK-ESP  (2 unrouted)
SDA  (3 unrouted)
SIG1  (3 unrouted)
SIG2  (2 unrouted)
  Top 0.152: VR1.1 -38.29,132.72 U3.1
SIG3  (3 unrouted)
SIG4  (3 unrouted)
SIG5  (3 unrouted)
SIG6  (3 unrouted)
SIG7  (3 unrouted)
SIG8  (3 unrouted)
SIG9  (3 unrouted)
SIG10  (3 unrouted)
SIG11  (3 unrouted)
SIG12  (3 unrouted)
SIG13  (3 unrouted)
SIG14  (3 unrouted)
SIG15  (3 unrouted)
SIG16  (3 unrouted)
SIG17  (3 unrouted)
SIG18  (3 unrouted)
SIG19  (3 unrouted)
SIG20  (3 unrouted)
SIN  (1 unrouted)
SW1B  (1 unrouted)
SW1G  (1 unrouted)
SW1NO+  (1 unrouted)
SW1R  (1 unrouted)
SW2B  (1 unrouted)
SW2G  (1 unrouted)
SW2NO+  (1 unrouted)
SW2R  (1 unrouted)
TXD-ESP  (2 unrouted)